# EAGLE board P.V.S.AVINASH AS-2 (EAGLE 9.6.2)
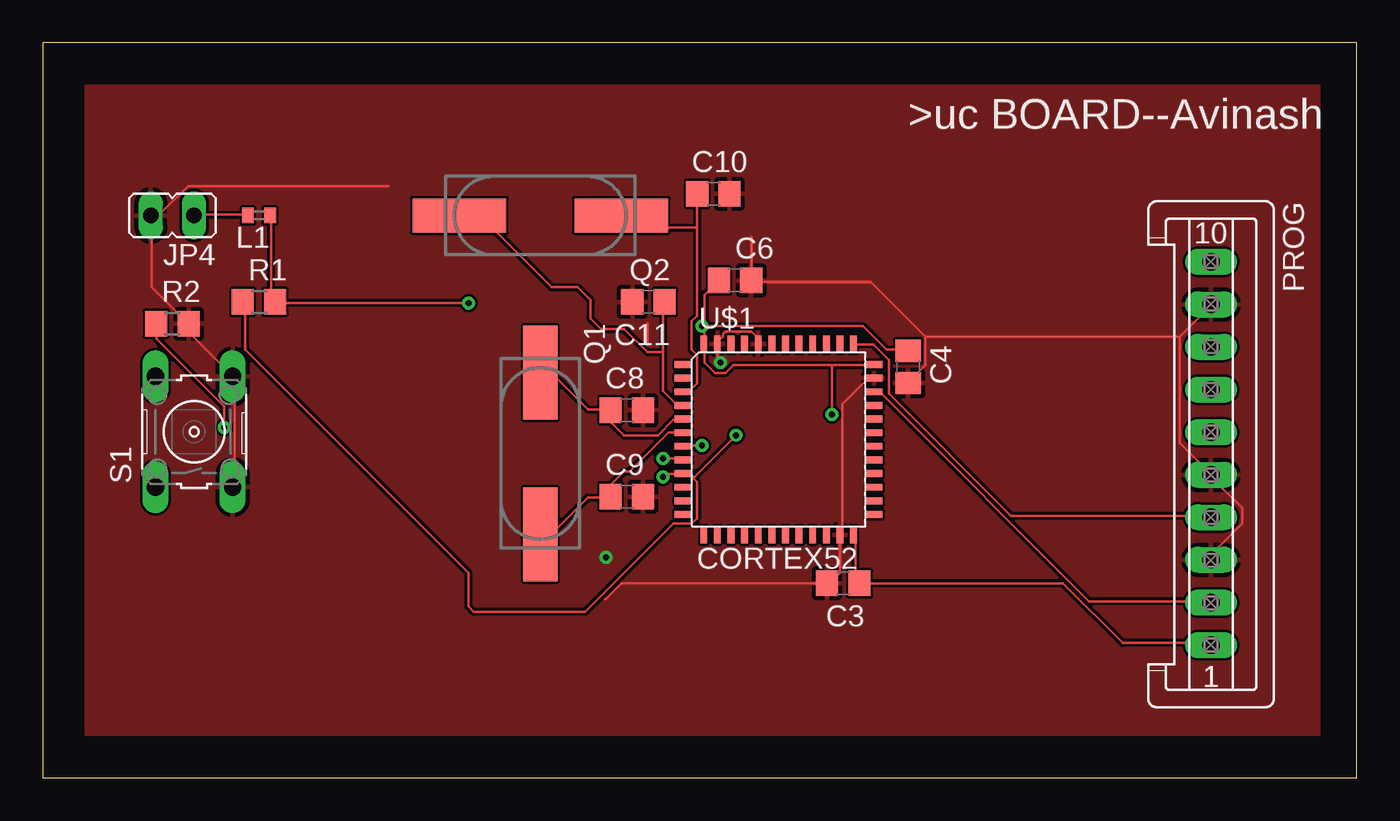
[diagram p0: board, top side]
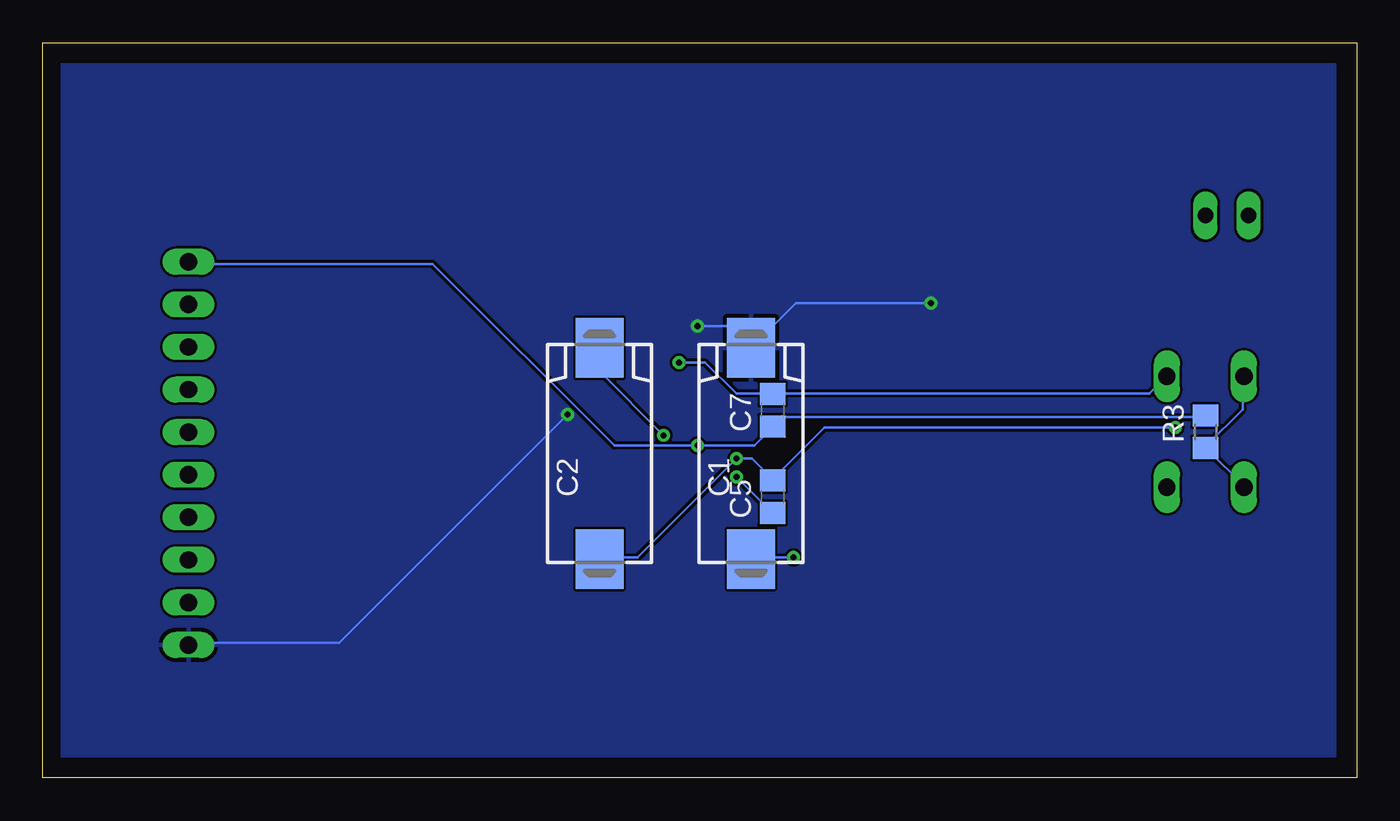
[diagram p1: board, bottom side, seen from below]

Size 77.14 x 43.17 mm. Coordinates in mm from the lower left corner, seen from the top.
Outline: 0,0 77.14,0 77.14,43.17 0,43.17 0,0
Copper layers (1*16): Top 0.035mm / dielectric 1.5mm / Bottom 0.035mm
Design rules "default": minimum track width 6mil, minimum drill 0.35mm, track to track 6mil, track to pad 6mil, pad to pad 6mil, via to via 6mil, smd to smd 6mil, copper to edge 40mil, drill to drill 6mil, minimum pad ring 10mil, minimum via ring 8mil, stop-mask expansion 4mil, vias tented up to drill 0mil, thermal gap 10mil

## Footprints (pad centres in the part's own frame; a part is rotated, then mirrored left to right if it is on the bottom)
139CLL-2R = smd 3.5 x 2.8: + 6.2,0; - -6.2,0
C0805 = smd 1.3 x 1.5: 1 -0.95,0; 2 0.95,0
JP1 = drill 0.914 long: 1 0,-1.27; 2 0,1.27
0402 = smd 0.7 x 0.9: 1 -0.65,0; 2 0.65,0
S10P = drill 1.016 long: 1 11.25,0; 2 8.75,0; 3 6.25,0; 4 3.75,0; 5 1.25,0; 6 -1.25,0; 7 -3.75,0; 8 -6.25,0; 9 -8.75,0; 10 -11.25,0
CSM-7X-DU = smd 5.5 x 2: 1 -4.75,0; 2 4.75,0
R0805 = smd 1.3 x 1.5: 1 -0.95,0; 2 0.95,0
B3F-10XX = drill 1.016 long: 1 -3.251,2.261; 2 3.251,2.261; 3 -3.251,-2.261; 4 3.251,-2.261
CORTEX52 = smd 0.4 x 1: BOOT0 3.9,11.5; PA3 0.7,0.3; PA4 1.5,0.3; PA5 2.3,0.3; PA6 3.1,0.3; PA7 3.9,0.3; PA14 9.5,11.5; PA15 8.7,11.5; PB0 4.7,0.3; PB1 5.5,0.3; PB2 6.3,0.3; PB3 7.9,11.5; PB4 7.1,11.5; PB5 6.3,11.5; PB6 5.5,11.5; PB7 4.7,11.5; PB8 3.1,11.5; PB9 2.3,11.5; PB10 7.1,0.3; PB11 7.9,0.3; VDD0 9.5,0.3; VDD2 0.7,11.5; VSS0 8.7,0.3; VSS2 1.5,11.5 | smd 1 x 0.4: NRST -0.5,5.5; OSC32_IN -0.5,8.7; OSC32_OUT -0.5,7.9; OSC_IN -0.5,7.1; OSC_OUT -0.5,6.3; PA0 -0.5,3.1; PA1 -0.5,2.3; PA2 -0.5,1.5; PA8 10.7,4.7; PA9 10.7,5.5; PA10 10.7,6.3; PA11 10.7,7.1; PA12 10.7,7.9; PA13 10.7,8.7; PB12 10.7,1.5; PB13 10.7,2.3; PB14 10.7,3.1; PB15 10.7,3.9; PC13 -0.5,9.5; VDD_USB 10.7,10.3; VDDA -0.5,3.9; VLCD -0.5,10.3; VSS1 10.7,9.5; VSSA -0.5,4.7

## Placement (x,y rotation side)
C1  10uF  [139CLL-2R]  35.56,19.05 90 bottom
C2  1uF  [139CLL-2R]  44.45,19.05 90 bottom
C3  100nF  [C0805]  46.99,11.43 180 top
C4  100nF  [C0805]  50.8,24.13 270 top
C5  100nF  [C0805]  34.29,16.51 90 bottom
C6  100nF  [C0805]  40.64,29.21 0 top
C7  100nF  [C0805]  34.29,21.59 90 bottom
C8  16pF  [C0805]  34.29,21.59 0 top
C9  16pF  [C0805]  34.29,16.51 0 top
C10  12pF  [C0805]  39.37,34.29 0 top
C11  12pF  [C0805]  35.56,27.94 180 top
JP4  [JP1]  7.62,33.02 90 top
L1  BLM15HD102SN1  [0402]  12.7,33.02 180 top
PROG  [S10P]  68.58,19.05 270 top
Q1  CSM-7X-DU  [CSM-7X-DU]  29.21,19.05 270 top
Q2  CSM-7X-DU  [CSM-7X-DU]  29.21,33.02 180 top
R1  0  [R0805]  12.7,27.94 0 top
R2  0  [R0805]  7.62,26.67 0 top
R3  0  [R0805]  8.89,20.32 90 bottom
S1  [B3F-10XX]  8.89,20.32 90 top
U$1  CORTEX52  [CORTEX52]  38.1,13.97 0 top

## Library data of the parts
C1-C11 = rcl; SPICEPREFIX: C
JP4 = jumper
L1 = inductors
PROG = con-amp-mt; OC_FARNELL: unknown; OC_NEWARK: unknown
Q1 Q2 = crystal; OC_FARNELL: unknown; OC_NEWARK: unknown
R1-R3 = rcl; SPICEPREFIX: R
S1 = switch-omron; MPN: B3F-1000; OC_FARNELL: 176432; OC_NEWARK: 36M3542
U$1 = coxtex32

## Nets
32KHZOSC1: C10.1 Q2.1 U$1.OSC32_IN
32KHZOSC2: C11.1 Q2.2 U$1.OSC32_OUT
AGND: C2.- C5.2 R2.1 U$1.VSSA
GND: C1.- C3.2 C4.2 C6.2 C7.2 C8.2 C9.2 C10.2 C11.2 JP4.2 PROG.3 PROG.5 PROG.9 R2.2 S1.3 S1.4 U$1.BOOT0 U$1.VSS0 U$1.VSS1 U$1.VSS2
N$1: JP4.1 L1.2
N$2: R3.1 S1.1 S1.2
N$5: U$1.VLCD
NRST: C7.1 PROG.10 R3.2 U$1.NRST
OSC1: C8.1 Q1.1 U$1.OSC_IN
OSC2: C9.1 Q1.2 U$1.OSC_OUT
SWCLK: PROG.4 U$1.PA14
SWDIO: PROG.2 U$1.PA13
VCC: C1.+ C3.1 C4.1 C6.1 L1.1 PROG.1 R1.2 U$1.VDD0 U$1.VDD2 U$1.VDD_USB
VDDA: C2.+ C5.1 R1.1 U$1.VDDA

## Tracks (layer width: path | path; a pad name or v marks a point on that pad's centre or on a via)
32KHZOSC1
  Top 0.152: 38.41,32.31 38.41,34.29 C10.1 | 38.41,32.31 38.41,27.13 38.1,26.82 38.1,25.15 38.41,24.84 38.41,23.16 37.95,22.71 37.64,22.71 U$1.OSC32_IN | 38.41,32.31 34.59,32.31 33.98,32.92 Q2.1
32KHZOSC2
  Top 0.152: 36.42,24.99 36.42,27.89 C11.1 | 36.42,24.99 36.42,22.71 37.19,21.95 37.49,21.95 U$1.OSC32_OUT | 36.42,24.99 35.51,24.99 34.14,26.37 32.77,26.37 32.16,26.98 32.16,28.04 31.39,28.8 29.87,28.8 25.76,32.92 24.54,32.92 Q2.2
AGND  (via drill 0.35)
  Top 0.152: v36.42,18.74 37.49,18.74 U$1.VSSA | v10.67,20.57 10.67,21.79 6.71,25.76 6.71,26.67 R2.1
  Bottom 0.152: 34.29,17.53 35.51,18.74 v36.42,18.74 42.22,12.95 44.45,12.95 C2.- | v10.67,20.57 31.24,20.57 34.29,17.53 | 34.29,17.53 C5.2
GND  (via drill 0.35)
  Top 0.152: U$1.BOOT0 41.91,25.6 41.91,25.91 41.6,26.21 40.08,26.21 39.93,26.06 39.93,25.91 39.62,25.6 U$1.VSS2 39.62,25.45 39.62,24.54 v39.78,24.38 | S1.3 11.28,17.07 11.28,23.47 S1.4 11.12,23.62 8.69,26.06 8.69,26.67 R2.2 8.53,26.67 6.4,28.8 6.4,32.92 JP4.2 6.4,33.07 6.86,33.07 8.53,34.75 20.32,34.75 | PROG.3 68.58,13.11 70.41,14.94 70.41,15.85 68.58,17.68 PROG.5 68.58,17.83 66.75,19.66 66.75,25.91 | 66.75,25.91 68.58,27.74 PROG.9 | U$1.VSS1 48.77,23.47 48.46,23.47 46.94,21.95 46.94,14.33 U$1.VSS0 46.79,14.17 46.79,12.04 46.18,11.43 C3.2 33.98,11.43 33.07,10.52 33.02,10.52 | v33.07,12.95 33.02,12.95 | 41.6,31.75 41.6,29.26 C6.2 41.6,29.11 48.62,29.11 51.82,25.91 | 51.82,25.91 51.82,24.23 50.9,23.32 C4.2 | 35.51,26.67 35.51,25.4 | 51.82,25.91 66.75,25.91
  Bottom 0.152: 34.29,22.55 12.19,22.55 11.28,23.47 S1.4 | v39.78,24.38 38.25,24.38 36.42,22.55 34.29,22.55 | 34.29,22.55 C7.2 | v33.07,12.95 35.51,12.95 C1.-
  pour Top: 25.4,27.94 25.4,10.16 33.02,10.16 33.02,15.24 36.83,15.24 36.83,24.13 36.83,25.4 31.75,25.4 31.75,27.94
  pour Top: 20.32,38.1 41.91,38.1 41.91,31.75 38.1,31.75 38.1,26.67 33.02,26.67 33.02,29.21 20.32,29.21
  pour Top: 2.54,40.64 74.93,40.64 74.93,39.37 74.93,2.54 73.66,2.54 2.54,2.54
N$1
  Top 0.152: L1.2 12.04,33.07 8.99,33.07 JP4.1
N$2
  Bottom 0.152: S1.1 6.55,17.07 8.84,19.36 R3.1 8.84,19.51 6.71,21.64 6.71,23.47 S1.2
NRST  (via drill 0.35)
  Top 0.152: v38.71,19.51 37.64,19.51 U$1.NRST
  Bottom 0.152: R3.2 8.99,21.18 33.83,21.18 34.29,20.73 C7.1 34.29,20.57 35.36,19.51 v38.71,19.51 43.59,19.51 54.25,30.17 68.58,30.17 PROG.10
OSC1
  Top 0.152: U$1.OSC_IN 37.49,21.03 37.03,21.03 36.12,20.12 34.14,20.12 33.38,20.88 33.38,21.49 C8.1 33.22,21.64 32,21.64 29.87,23.77 29.26,23.77 Q1.1
OSC2
  Top 0.152: U$1.OSC_OUT 37.49,20.27 36.73,20.27 34.44,17.98 34.14,17.98 33.38,17.22 33.38,16.61 C9.1 33.22,16.46 32,16.46 29.87,14.33 29.26,14.33 Q1.2
SWCLK
  Top 0.152: U$1.PA14 47.7,25.45 48.77,25.45 49.68,24.54 49.68,22.55 56.85,15.39 68.58,15.39 PROG.4
SWDIO
  Top 0.152: U$1.PA13 48.92,22.55 49.23,22.55 61.42,10.36 68.58,10.36 PROG.2
VCC  (via drill 0.35)
  Top 0.152: U$1.VDD0 47.7,14.17 47.7,11.58 47.85,11.43 C3.1 59.89,11.43 63.4,7.93 68.58,7.93 PROG.1 | 38.86,26.52 38.86,28.35 39.62,29.11 C6.1 | 38.86,26.52 38.86,25.6 U$1.VDD2 38.86,25.45 38.86,24.38 39.47,23.77 40.08,23.77 40.54,24.23 46.33,24.23 | 46.33,24.23 48.77,24.23 U$1.VDD_USB | 38.86,26.52 48.16,26.52 49.53,25.15 50.75,25.15 C4.1 | L1.1 13.41,32.92 13.41,28.19 13.56,28.04 R1.2 13.72,27.89 v24.99,27.89 | v38.71,26.52 38.86,26.52 | 46.33,24.23 v46.33,21.34
  Bottom 0.152: v24.99,27.89 32.92,27.89 35.51,25.3 C1.+ 35.66,25.3 36.88,26.52 v38.71,26.52 | v46.33,21.34 59.74,7.93 68.58,7.93 PROG.1
  pour Bottom: 1.27,41.91 76.2,41.91 76.2,1.27 1.27,1.27
VDDA  (via drill 0.35)
  Top 0.152: v36.42,17.68 36.58,17.83 37.49,17.83 U$1.VDDA 37.64,17.83 37.95,17.83 38.1,17.68 | 38.1,17.68 38.41,17.37 38.41,15.24 38.1,14.94 37.03,14.94 31.85,9.75 25.3,9.75 24.99,10.06 24.99,12.04 11.89,25.15 11.89,27.89 R1.1 | v40.69,20.12 38.25,17.68 38.1,17.68
  Bottom 0.152: v36.42,17.68 34.29,15.55 C5.1 | v40.69,20.12 44.45,23.88 C2.+

## Text on the board
tPlace: >uc BOARD--Avinash